# Altium PCB LED-Chaser.PcbDoc
Units mm, origin at the board's own origin, x right, y up, seen from the top; angles counter-clockwise.
Board outline 67 x 67 mm, 2 copper layers (Top Layer, Bottom Layer), stack 1.1 mm thick; 19 components, 17 nets, 59 pads, 12 vias.
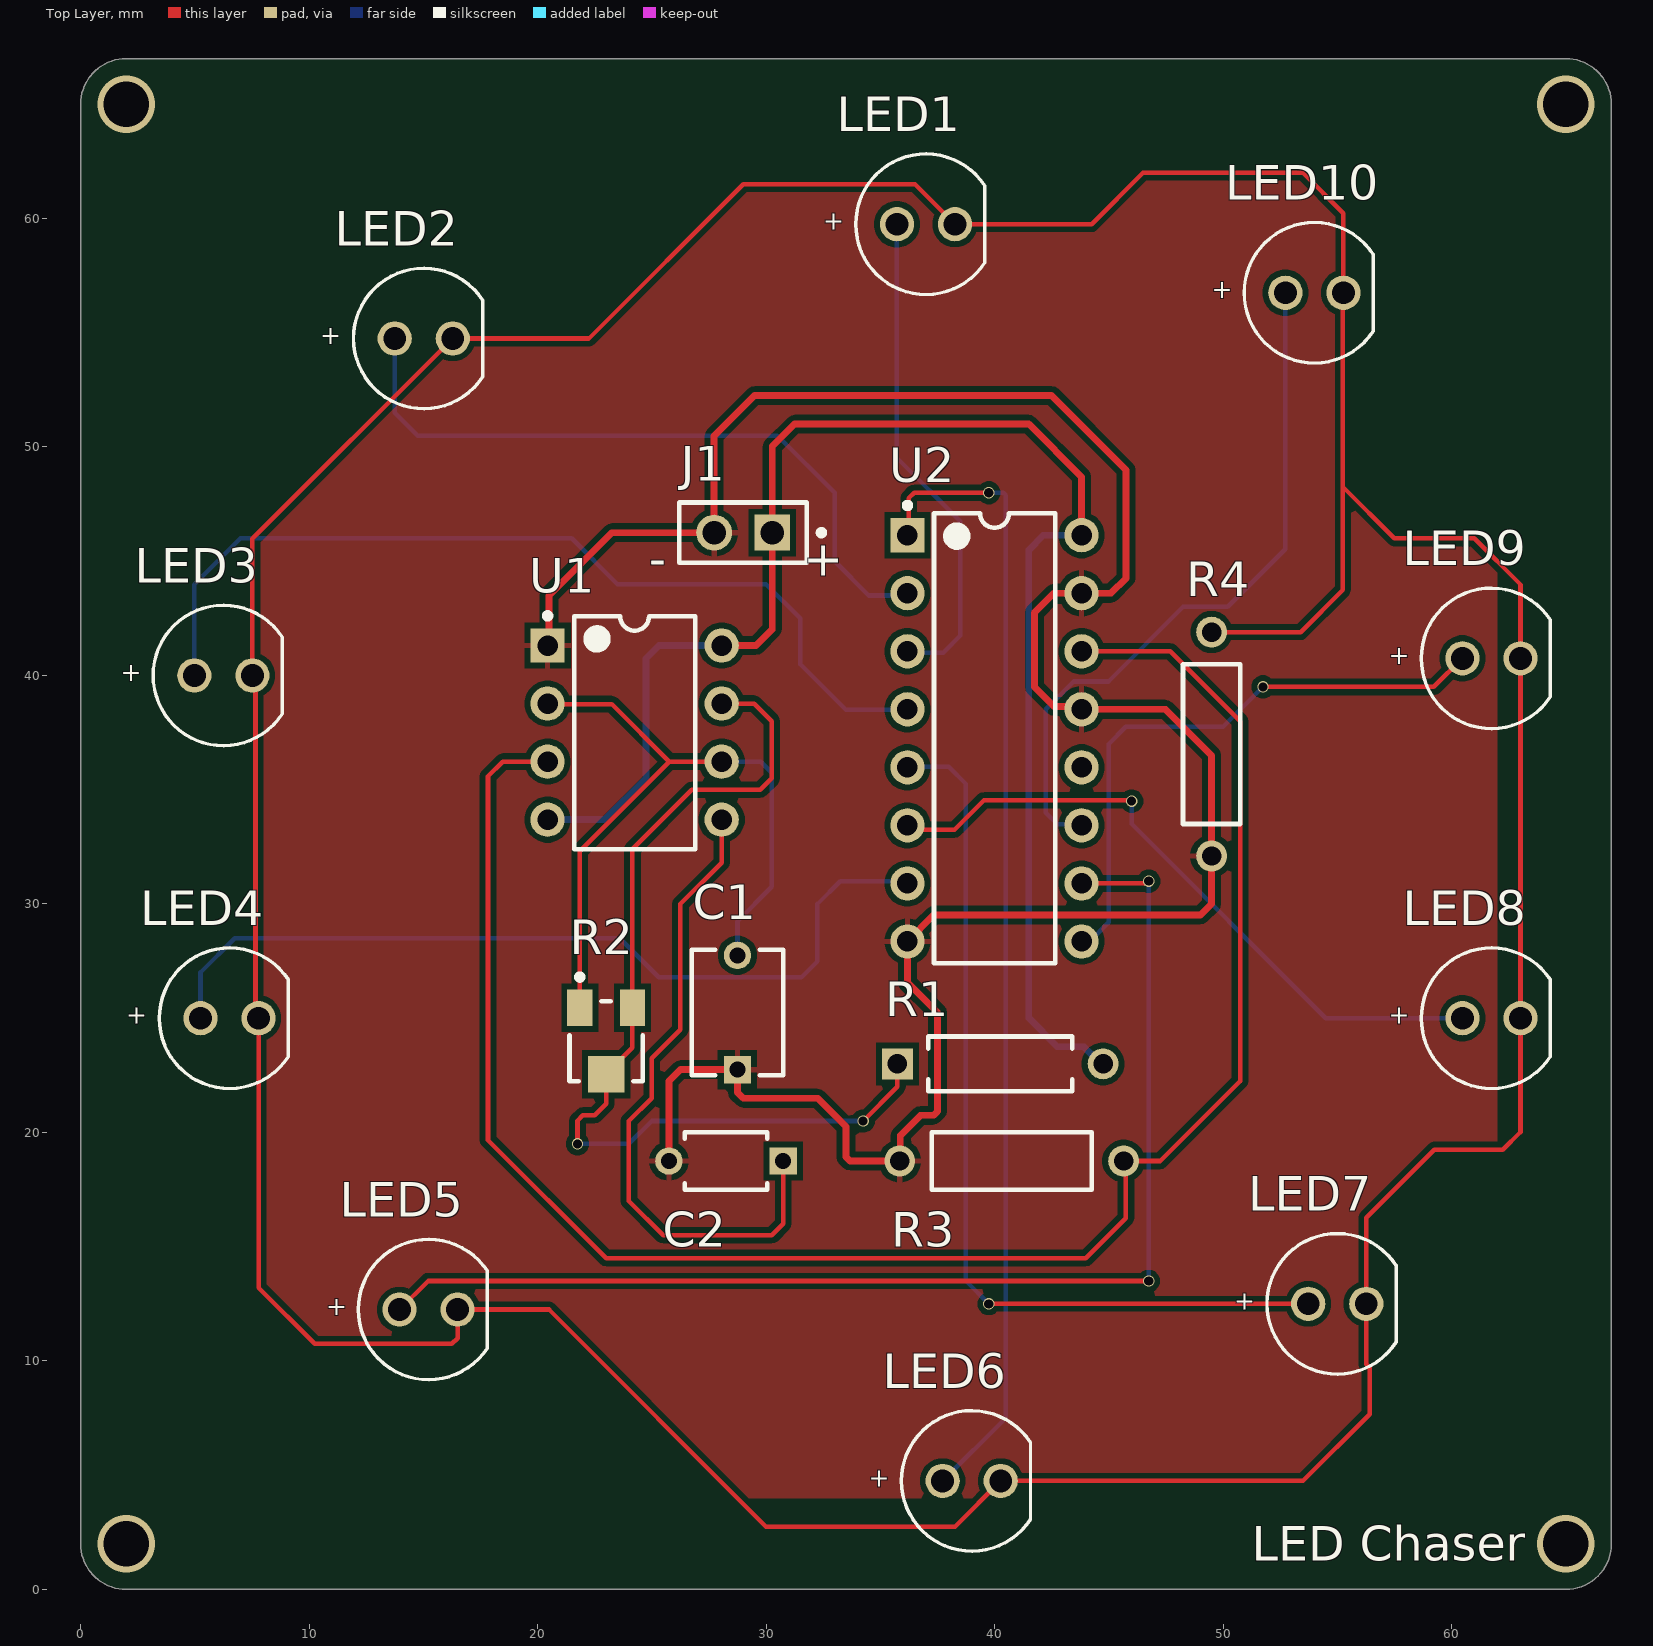
[diagram p0: Top Layer view]
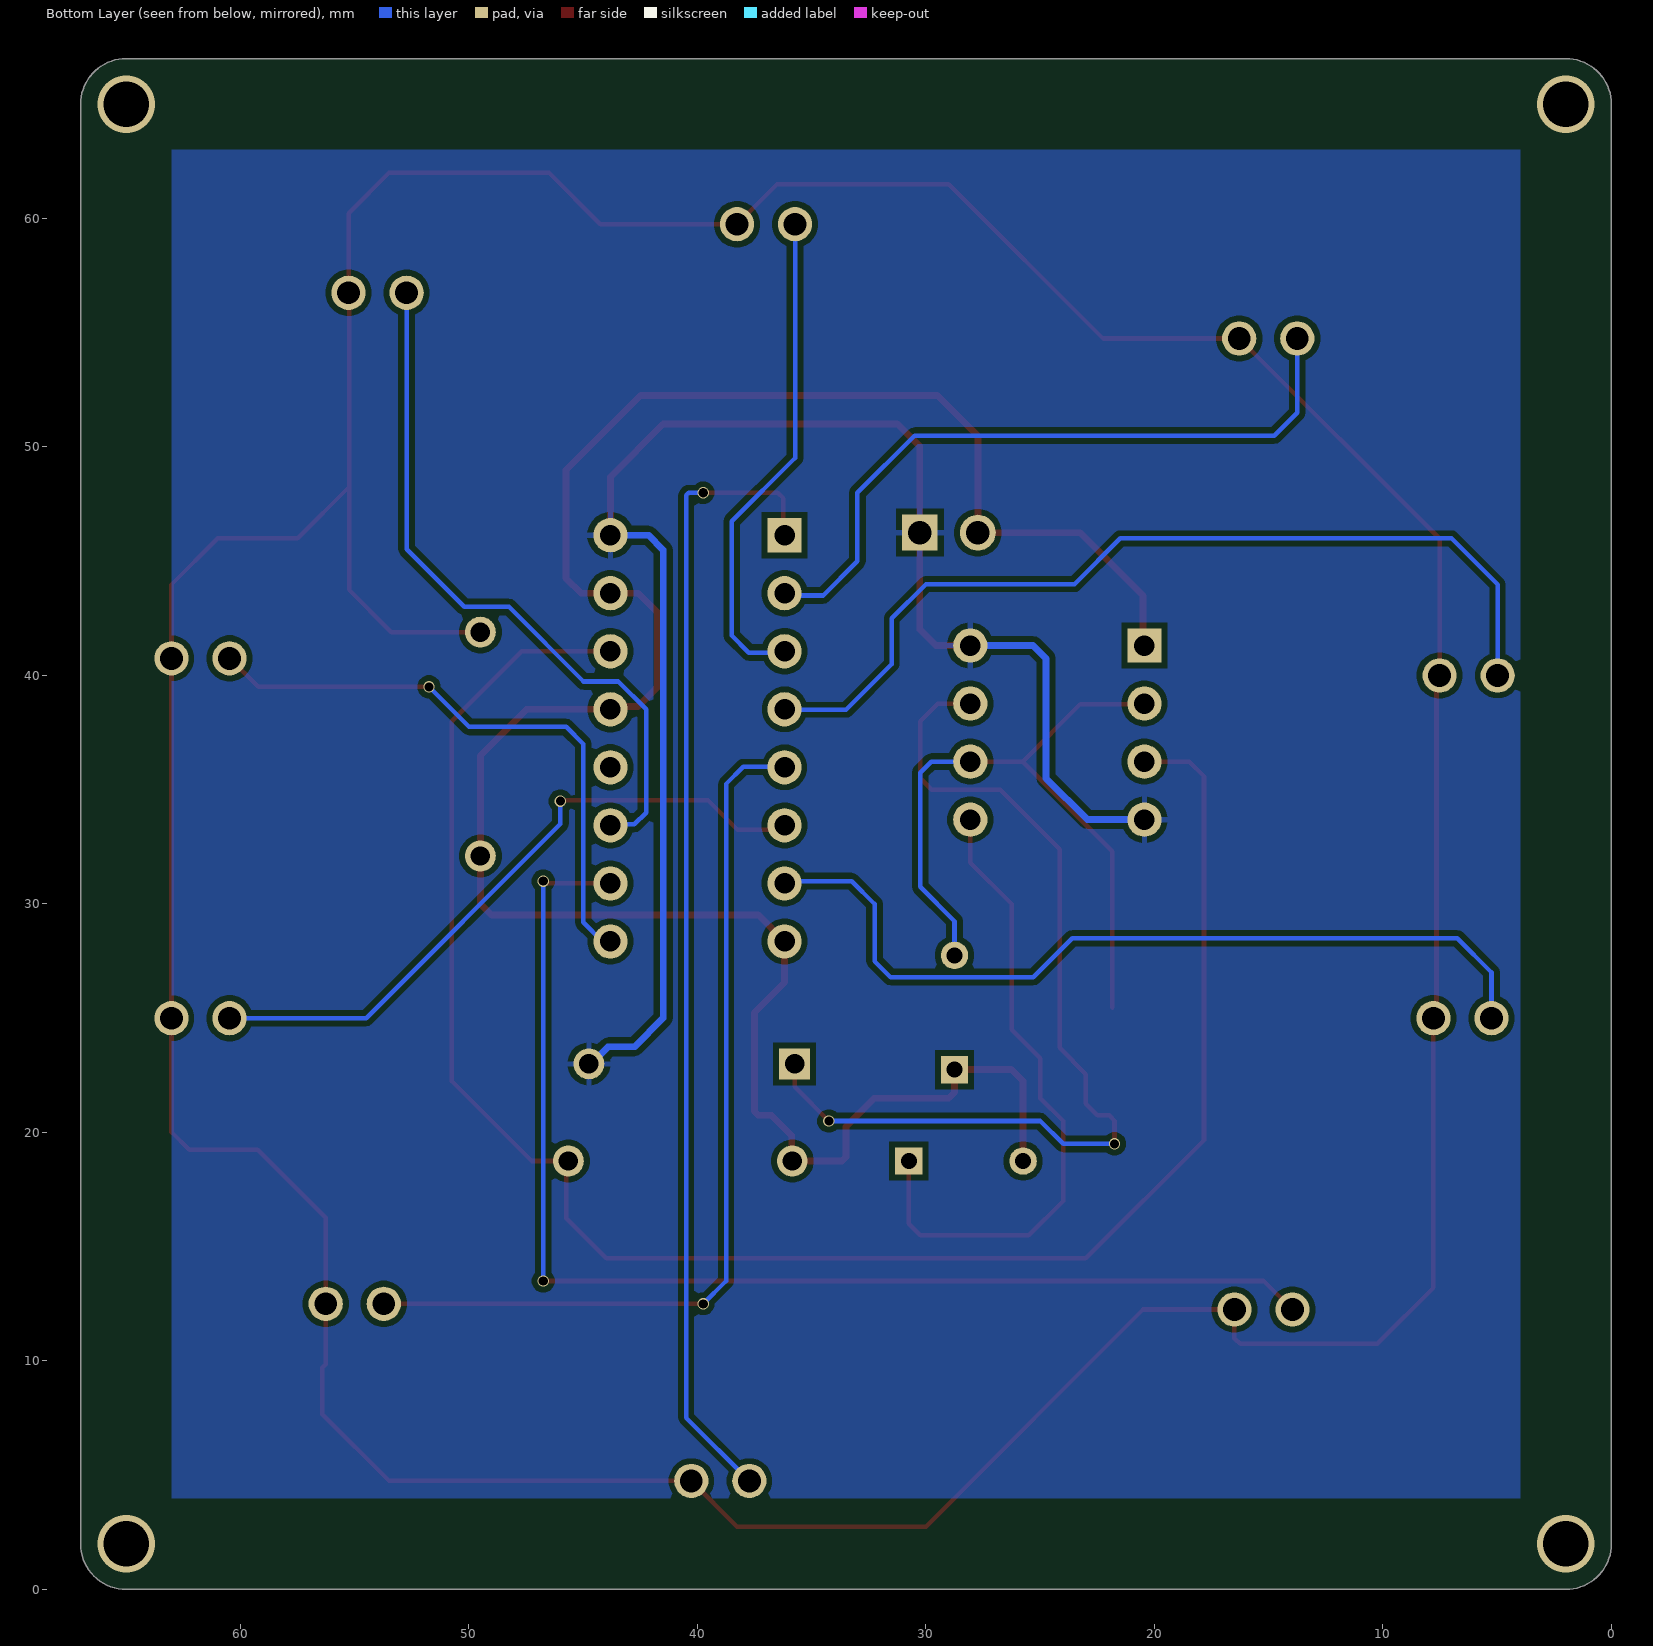
[diagram p1: Bottom Layer view, seen from below]
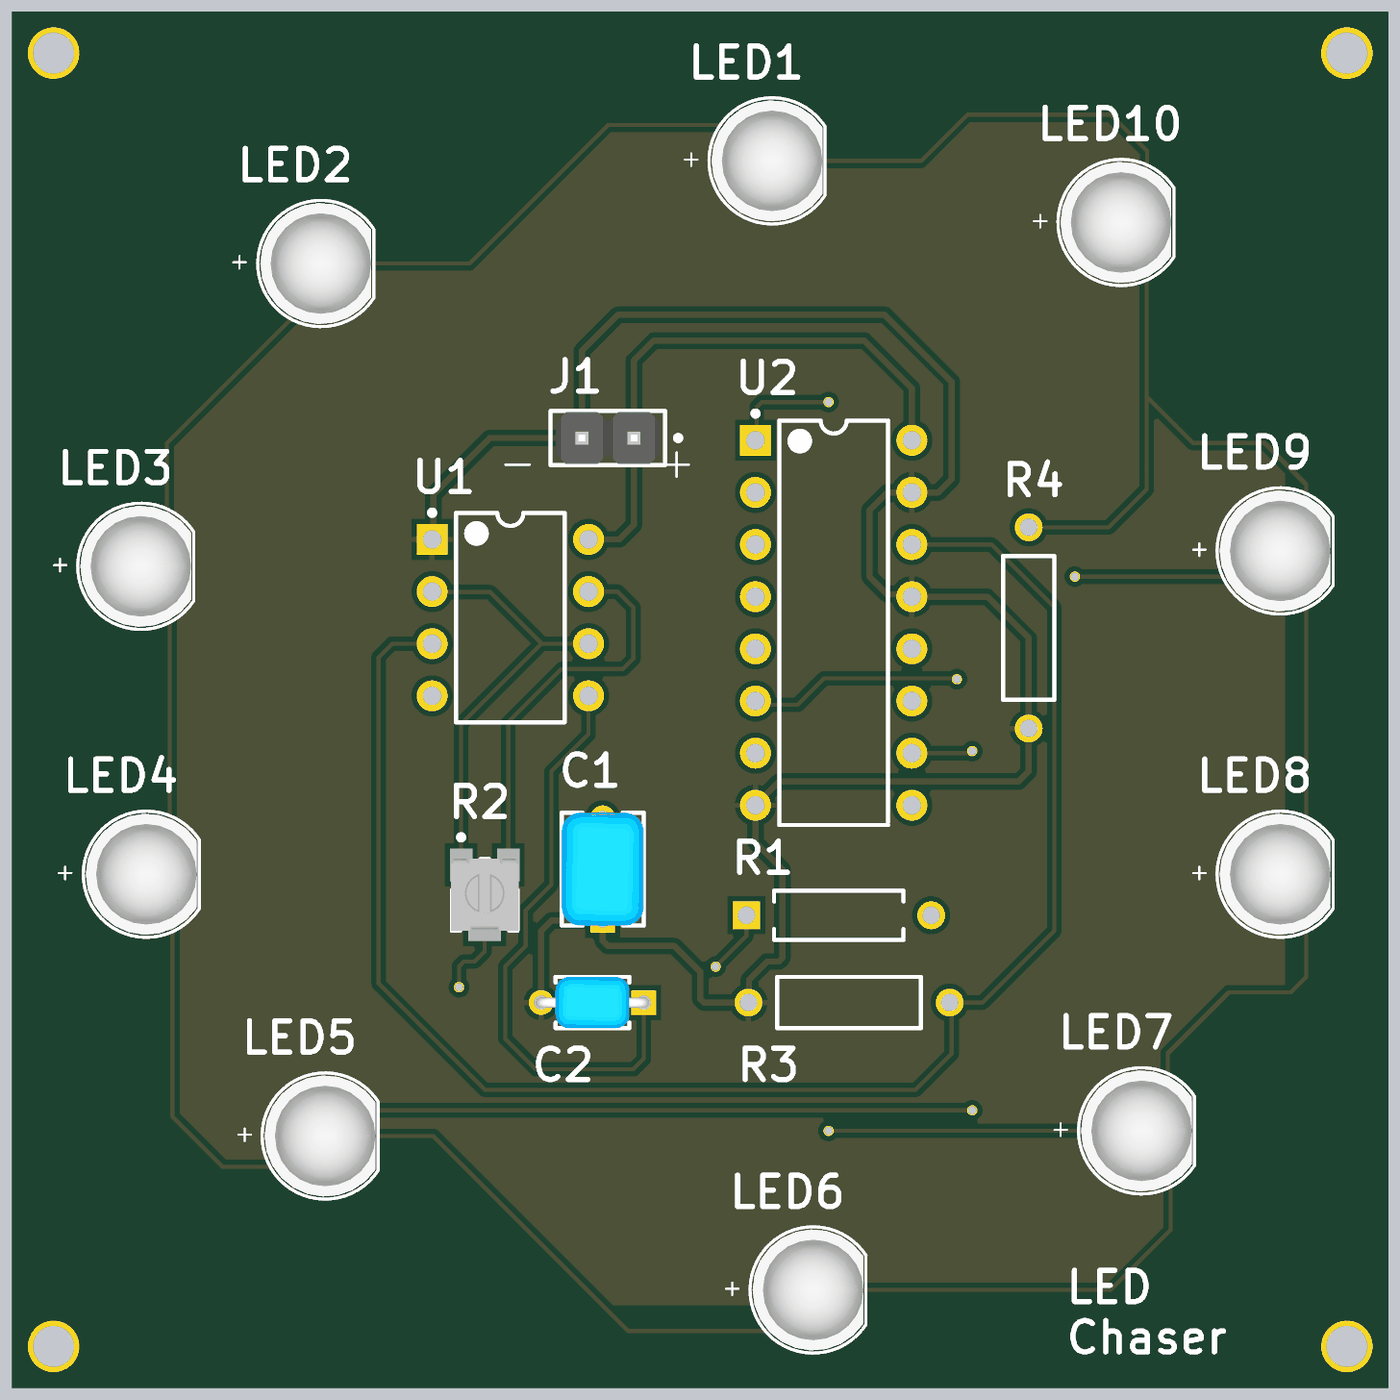
[diagram p2: 3D render of the assembled board from above, using the file's embedded part models]

## Layer stack, top to bottom
Top Solder: solder mask 0.05, Solder Resist, Dk 3.5
Top Layer: signal copper 0.1
Dielectric 1: dielectric 0.9, FR-4, Dk 4.8
Bottom Layer: signal copper 0.1
Bottom Solder: solder mask 0.05, Solder Resist, Dk 3.5

## Board outline
2,0 65,0 ccw(c65,2) 67,2 67,65 ccw(c65,65) 65,67 2,67 ccw(c2,65) 0,65 0,2 ccw(c2,2)

## Design rules (kind name [scope] priority, off if disabled: settings)
Clearance [All] p1: gap=0.25 ignorepadtopadclearanceinfootprint=FALSE
PolygonConnect [All] p1: connectstyle=Relief reliefconductorwidth=0.254 reliefentries=4 polygonreliefangle="90 Angle" airgapwidth=0.254
RoutingVias [All] p1: holewidth=0.4 width=0.5 viastyle="Through Hole" minholewidth=0.4 minwidth=0.5 maxholewidth=0.4 maxwidth=0.5
SolderMaskExpansion [All] p1: expansion=0 istentingtop=FALSE
Width WidthPOW [(InNet('VCC') OR InNet('GND'))] p1: maxlimit=0.3 minlimit=0.2 preferedwidth=0.3
Width [All] p2: maxlimit=0.2 minlimit=0.1 preferedwidth=0.2
30 further rules are at their usual default settings.

## Components (designator, comment, footprint, x,y, rotation, side; value= is the part's Value field where it differs from the comment)
C1 "RCER71E226MWM1H03A" FP-RCEWM1-MFG 28.75,25.25 r90 top
C2 "RCER71H103K0K1H03B" FP-RCE0K1-MFG 28.25,18.75 r180 top
J1 "M20-9990246" FP-M20-9990246-MFG 29,46.25 r180 top
LED1 "151051BS04000" WL-TMRC_D5.9H8.7 37,59.75 r0 top
LED2 "151051BS04000" WL-TMRC_D5.9H8.7 15.02,54.75 r0 top
LED3 "151051BS04000" WL-TMRC_D5.9H8.7 6.25,40 r0 top
LED4 "151051BS04000" WL-TMRC_D5.9H8.7 6.52,25 r0 top
LED5 "151051BS04000" WL-TMRC_D5.9H8.7 15.23,12.25 r0 top
LED6 "151051BS04000" WL-TMRC_D5.9H8.7 39,4.75 r0 top
LED7 "151051BS04000" WL-TMRC_D5.9H8.7 55,12.5 r0 top
LED8 "151051BS04000" WL-TMRC_D5.9H8.7 61.75,25 r0 top
LED9 "151051BS04000" WL-TMRC_D5.9H8.7 61.75,40.75 r0 top
LED10 "151051BS04000" WL-TMRC_D5.9H8.7 54,56.75 r0 top
R1 "MFR-25FBF52-1M" RESA60-630X240 40.25,23 r0 top value=1M
R2 "3313J-1-503E" BOUR-3313J-1_V 23,24 r270 top
R3 "OD103JE" OMTE-RES7X2.5-2 40.75,18.75 r0 top
R4 "OD103JE" OMTE-RES7X2.5-2 49.5,37 r90 top
U1 "NE555P" P0008A 24.25,37.5 r0 top
U2 "CD74HC4017E" N0016A 40,37.25 r0 top

## Footprints (in the part's own frame and the unit in brackets; to place one, negate y for a bottom-side part, rotate by r counter-clockwise, add the part's x,y. Pads: shape width x height; smd on the part's side, far side on the other; paste and mask are expansions set on the pad)
BOUR-3313J-1_V [mm] "SMD, 3-Leads, Body 3.5x3.2mm, Pitch 1.15mm"
  rect 1.6x1.1 smd paste+0: 1(-1.45,-1.15) 3(-1.45,1.15)
  rect 1.6x1.6 smd paste+0: 2(1.45,0)
  silkscreen extent -2.92,-1.6 1.75,1.6, body extent -1.75,-1.65 1.75,1.65, height 2.11
FP-M20-9990246-MFG [mm]
  rect 1.57x1.57 hole 1.02 paste-2539.97 mask+0: 1(-1.27,0)
  round 1.57 hole 1.02 paste-2539.97 mask+0: 2(1.27,0)
  silkscreen extent -3.55,-1.32 2.79,1.32, body extent -2.89,-1.42 2.89,1.42, height 0.25
FP-RCE0K1-MFG [mm]
  rect 1.2x1.2 hole 0.7 paste-2539.97 mask+0: 1(-2.5,0)
  round 1.2 hole 0.7 paste-2539.97 mask+0: 2(2.5,0)
  silkscreen extent -1.8,-1.25 1.8,1.25, body extent -3.2,-1.35 3.2,1.35, height 0.25
FP-RCEWM1-MFG [mm]
  rect 1.2x1.2 hole 0.7 paste-2539.97 mask+0: 1(-2.5,0)
  round 1.2 hole 0.7 paste-2539.97 mask+0: 2(2.5,0)
  silkscreen extent -2.75,-2 2.75,2, body extent -3.2,-2.1 3.2,2.1, height 0.25
N0016A [mm] "DIP, 16-Leads, Body 19.7x6.6mm, Pitch 2.54mm"
  rect 1.5x1.5 hole 0.9: 1(-3.81,8.89)
  round 1.5 hole 0.9: 2(-3.81,6.35) 3(-3.81,3.81) 4(-3.81,1.27) 5(-3.81,-1.27) 6(-3.81,-3.81) 7(-3.81,-6.35) 8(-3.81,-8.89) 9(3.81,-8.89) 10(3.81,-6.35) 11(3.81,-3.81) 12(3.81,-1.27) 13(3.81,1.27) 14(3.81,3.81) 15(3.81,6.35) 16(3.81,8.89)
  silkscreen extent -3.93,-9.85 2.65,10.31, body extent -3.95,-9.85 3.95,9.85, height 5.08
OMTE-RES7X2.5-2 [mm] "Resistor, Axial; Body 7x2.5mm, Lead Dia. 0.6mm"
  round 1.35 hole 0.85: 1(-4.9,0) 2(4.9,0)
  silkscreen extent -3.5,-1.25 3.5,1.25, body extent -3.5,-1.25 3.5,1.25, height 2.5
P0008A [mm] "DIP, 8-Leads, Body 10.15x6.6mm, Pitch 2.54mm"
  rect 1.5x1.5 hole 0.9: 1(-3.81,3.81)
  round 1.5 hole 0.9: 2(-3.81,1.27) 3(-3.81,-1.27) 4(-3.81,-3.81) 5(3.81,-3.81) 6(3.81,-1.27) 7(3.81,1.27) 8(3.81,3.81)
  silkscreen extent -3.93,-5.1 2.65,5.23, body extent -3.95,-5.07 3.95,5.07, height 5.08
RESA60-630X240 [mm] "Axial Resistor, 2-Leads, Dia 2.4mm, Body Length 6.3mm"
  rect 1.35x1.35 hole 0.85: 1(-4.5,0)
  round 1.35 hole 0.85: 2(4.5,0)
  silkscreen extent -3.15,-1.2 3.15,1.2, body extent -4.77,-1.19 4.77,1.2, height 2.4
WL-TMRC_D5.9H8.7 [mm] "THT Mono-color Round Color LED, 2-leads"
  round 1.5 hole 1: 1(-1.27,0) 2(1.27,0)
  silkscreen extent -3.07,-3.07 2.58,3.08, body extent -2.95,-2.95 2.45,2.95, height 9.2

## Part data
C1: library part CMP-06035-003622-1, "CAP CER 22UF 25V X7R RADIAL", Capacitance=22uF, Case/Package=Radial, Dielectric=X7R, Max Operating Temperature=125°C, Min Operating Temperature=-55°C, Package Quantity=1500, Ratings=AEC-Q200, Resistor Type=Ceramic, Tolerance=20%, Voltage Rating=25V, Height=7.5mm, Height - Seated (Max)=0.295inch, Lead Diameter=0.5mm, Lead Pitch=0.197inch, Lead/Base Style="Formed Leads", Length=0.217inch, Mount="Through Hole", Packaging="Tape and Reel", Termination=Radial, Voltage Rating (DC)=25V, Width=0.157inch
C2: library part CMP-06035-044411-1, "Cap Ceramic 10nF 50V X7R ±10% Radial 5mm +125°C Automotive Bulk", Capacitance=10nF, Case/Package=Radial, Dielectric=X7R, Max Operating Temperature=125°C, Min Operating Temperature=-55°C, Package Quantity=500, Ratings=AEC-Q200, Resistor Type=Ceramic, Tolerance=10%, Voltage Rating=50V, Height=3.5mm, Height - Seated (Max)=0.138inch, Lead Diameter=0.5mm, Lead Free="Lead Free", Lead Pitch=0.197inch, Lead/Base Style="Formed Leads", Length=0.142inch, Mount="Through Hole", Packaging=Bulk, Termination=Radial, Voltage Rating (DC)=50V, Width=0.098inch
J1: library part CMP-15831-000009-1, "CONN HEADER VERT 2POS 2.54MM", Current Rating=3A, Manufacturer=Harwin, Temperature="-40°C to +105°C", Temperature Range High=+105°C, Temperature Range Low=-40°C, Automotive=No, Category=Conn, ComponentLink2Description=Datasheet, ComponentLink2URL=https://cdn.harwin.com/pdfs/M20-999.pdf, Conn Gender=Male, Conn Orientation=Vertical, Contact Material=Tin,Nickel, Device Class L1=Connectors, Device Class L2="Headers and Wire Housings", Device Class L3=unset, Digikey Description="CONN HEADER VERT 2POS 2.54MM", Height=8.99mm, Lead Free=Yes, Manufacturer Part Number=M20-9990246, Mouser Description="2.54mm (0.1\") Pitch SIL Vertical PC Tail Pin Header, 6.1mm mating pin height, tin, 2 contacts", Number Of Contacts=2, Number Of Rows=1, Octopart=https://octopart.com/m20-9990246-harwin-2590635, Package=M20-9990246, Pitch=2.54mm, RoHS=TRUE
LED1 LED2 LED3 LED4 LED5 LED6 LED7 LED8 LED9 LED10: library part CMP-1488-00009-2, Case/Package=Radial, Color=Blue, Forward Current=100mA, Forward Voltage=3.2V, Max Operating Temperature=85°C, Max Reverse Voltage (DC)=5V, Min Operating Temperature=-40°C, Test Current=20mA, Dominant Wavelength=470nm, Height=8.6mm, Length=5mm, Lens Size=5mm, Lens Style="Circular, Diffused, Round", Luminous Intensity=500mcd, Mount="Through Hole", NexarPartId=29717812, Packaging=Bulk, Peak Wavelength=465nm, REACH SVHC=Unknown, RoHS=Compliant, Viewing Angle=40°, Wavelength=470nm, Width=5mm
R1: library part CMP-009-00049-4, "Axial Resistor, 1 MOhm, +/- 1%, 250 mW, -55 to 155 degC, 2-Pin THD, RoHS, Bulk", Case/Package=Axial, Manufacturer=Yageo, Max Operating Temperature=155°C, Min Operating Temperature=-55°C, Package Description="2-Pin Axial Lead, Dia 2.4 mm, Body Length 6.3 mm", Package Quantity=200, Package Reference=MFR-25, Power=250mW, Tolerance=1%, Voltage Rating=250V, Datasheet URL=http://www.yageo.com/documents/recent/Yageo%20LR_MFR_2013.pdf, Datasheet Version=Apr-13, Manufacturer URL=http://www.yageo.com/, Mounting Technology=TH, Packaging=Bulk, RoHS Compliant=True
R2: library part CMP-2000-05588-1, "3 mm Trimpot(R) Trimming Potentiometer, 50 KOhm, +/- 20%, 0.125 W, -55 to 125 degC, 3-Pin SMD, RoHS, Tape and Reel", Manufacturer=Bourns, Package Description="3-Pin Surface Mount Device, Body 3.5 x 3.2 mm, Pitch 1.15 mm", Package Reference=3313J-1, Power Rating=125mW, Resistance Tolerance=±20%, Temperature Coefficient=±150ppm/°C, Track Resistance=50kohm, Datasheet URL=http://www.bourns.com/docs/Product-Datasheets/3313.pdf, Datasheet Version=05/2016, Manufacturer URL=http://www.bourns.com/, Mounting Technology=SurfaceMount, No. of Turns=1, Potentiometer Mounting=SMD, SVHC=NoSVHC(19-Dec-2012)
R3: library part CMP-2000-06865-1, "Little Demon(R) Carbon Composition Molded OD Series, 250 V, 10 KOhm, +/-5%, -70 to 130 degC, 2-Pin THD, RoHS, Bulk", Manufacturer=Ohmite, Operating Temperature=-, Package / Case=Axial, Package Description="2-Pin THD Resistor, Body 7 x 2.5 mm, Lead Dia. 0.6 mm", Package Reference=RES7X2.5, Power (Watts)=0.25W,1/4W, Power Rating=0.25W, Resistance (Ohms)=10k, Standard Package=100, Tolerance=±5%, Catalog Drawings=OD,OF,OASeries, Category=Resistors, Composition=CarbonComposition, Datasheet URL=http://www.ohmite.com/cat/res_od_of_oa.pdf, Datasheet Version=06/2016, EDA / CAD Models=DownloadfromAcceleratedDesigns, Family=ThroughHoleResistors, Features=PulseWithstanding, Height=-, Manufacturer URL=http://www.ohmite.com/, Mounting Technology=ThroughHole, Number of Terminations=2, Online Catalog=OD,OF,OASeries,LittleDemon®, Packaging=Bulk, PartNumber=OD103JE, RoHS Information="LittleDemon\"E\"SeriesMaterialDeclaration", Series=LittleDemon®OD, Size / Dimension="0.098\"Diax0.276\"L(2.50mmx7.00mm)", Supplier Device Package=Axial, Temperature Coefficient=-
R4: library part CMP-2000-06865-1, "Little Demon(R) Carbon Composition Molded OD Series, 250 V, 10 KOhm, +/-5%, -70 to 130 degC, 2-Pin THD, RoHS, Bulk", Manufacturer=Ohmite, Operating Temperature=-, Package / Case=Axial, Package Description="2-Pin THD Resistor, Body 7 x 2.5 mm, Lead Dia. 0.6 mm", Package Reference=RES7X2.5, Power (Watts)=0.25W,1/4W, Power Rating=0.25W, Resistance (Ohms)="120 ohm", Standard Package=100, Tolerance=±5%, Catalog Drawings=OD,OF,OASeries, Category=Resistors, Composition=CarbonComposition, Datasheet URL=http://www.ohmite.com/cat/res_od_of_oa.pdf, Datasheet Version=06/2016, EDA / CAD Models=DownloadfromAcceleratedDesigns, Family=ThroughHoleResistors, Features=PulseWithstanding, Height=-, Manufacturer URL=http://www.ohmite.com/, Mounting Technology=ThroughHole, Number of Terminations=2, Online Catalog=OD,OF,OASeries,LittleDemon®, Packaging=Bulk, PartNumber=OD103JE, RoHS Information="LittleDemon\"E\"SeriesMaterialDeclaration", Series=LittleDemon®OD, Size / Dimension="0.098\"Diax0.276\"L(2.50mmx7.00mm)", Supplier Device Package=Axial, Temperature Coefficient=-
U1: library part CMP-2000-04954-1, "Precision Timer, 4.5 to 16 V, 0 to 70 degC, 8-Pin DIP, Pb-Free, Tube", Manufacturer=TexasInstruments, Maximum High Level Output Current=-200mA, Maximum Low Level Output Current=200mA, Operating Supply Voltage=5, Package=8PDIP, Package Description="8-Pin Double In-line Package, Body 9.59 x 6.35 mm, Pitch 2.54 mm", Package Reference=P8, Category=Timer, Datasheet URL=http://www.ti.com/general/docs/lit/getliterature.tsp?genericPartNumber=NE555&fileType=pdf, Datasheet Version="Rev. I, 09/2014", Manufacturer URL=http://www.ti.com/, Number of Internal Timers=1, Package URL=http://www.ti.com/lit/ml/mpdi001b/mpdi001b.pdf, Packaging=Rail/Tube, Rad Hard=No, Type=Standard
U2: library part CMP-1623-00548-2, "High Speed CMOS Logic Decade Counter/Divider with 10 Decoded Outputs, N0016A, TUBE", F @ Nom Voltage(Max)(Mhz)=28, Generic Part Number=CD74HC4017, ICC @ Nom Voltage(Max)(mA)=0.08, Manufacturer="Texas Instruments", Operating Temperature Range(C)="-55 to 125", Rating=Catalog, tpd @ Nom Voltage(Max)(ns)=54, Voltage(Nom)(V)=3.3,5, Bits(#)=10, Code_JEDEC=MS-001, DatasheetVersion=SCHS200D, Function=Counter, Input Type=LVTTL/CMOS, Inputs=1, Output Drive (IOL/IOH)(Max)(mA)=5.2/-5.2, Output Type=CMOS, PackageReference=N0016A, Schmitt Trigger=No, Technology Family=HC, Type=Decade, VCC(Max)(V)=6, VCC(Min)(V)=2

## Via types
v1: diameter 0.5, hole 0.4, Top Layer to Bottom Layer, 8 vias
v2: diameter 2.5, hole 2, Top Layer to Bottom Layer, 4 vias

## Nets (pads, with @x,y where several pads share a name; then routed paths per layer and width w, separated by ;. In a path a pad name is that pad's centre, name@x,y a point inside that pad or via, vN(x,y) a via of type N, cw(c..) or ccw(c..) an arc to the next point about the centre after c; other vN are vias at no path point)
GND: C1.1 C2.2 J1.2 R3.1 R4.1 U1.1 U2.8 U2.13 U2.15 | length 105
  Top Layer w0.3: U1.1 20.5,41.37 20.5,43.5 23.25,46.25 J1.2 27.73,50.48 29.5,52.25 42.5,52.25 45.75,49 45.75,44.25 45.1,43.6 42.6,43.6 41.75,42.75 41.75,39.5 42.61,38.64 43.69,38.64 U2.13 47.48,38.52 49.5,36.5 R4.1 49.5,30 49.01,29.51 37.34,29.51 U2.8 36.19,26.56 37.5,25.25 37.5,20.926 37.324,20.75 36.75,20.75 35.875,19.875 35.875,18.775 R3.1 33.676,18.75 33.5,18.926 33.5,20.25 32.25,21.5 29,21.5 28.75,21.75 C1.1 26.25,22.75 25.75,22.25 C2.2
NetC1_2: C1.2 R2.1 U1.2 U1.6 | length 32.1
  Top Layer w0.2: U1.2 20.46,38.75 23.25,38.75 25.77,36.23 ; R2.1 21.85,32.31 25.77,36.23 ; U1.6 25.77,36.23
  Bottom Layer w0.2: U1.6 29.77,36.23 30.25,35.75 30.25,30.75 28.75,29.25 C1.2
NetC2_1: C2.1 U1.5 | length 28.7
  Top Layer w0.2: U1.5 28.06,31.81 26.25,30 26.25,24.5 25,23.25 25,21.5 24,20.5 24,17 25.5,15.5 30.25,15.5 30.75,16 C2.1
NetLED1_1: LED1.1 U2.3 | length 21.8
  Bottom Layer w0.2: LED1.1 35.73,49.52 38.5,46.75 38.5,41.75 37.75,41 36.25,41 U2.3
NetLED1_2: LED1.2 LED2.2 LED3.2 LED4.2 LED5.2 LED6.2 LED7.2 LED8.2 LED9.2 LED10.2 R4.2 | length 219.9
  Top Layer w0.2: LED3.2@7.5,40 LED3.2 ; LED4.2@7.75,25 LED4.2 ; LED1.2@38.25,59.75 38.25,59.77 36.52,61.5 29,61.5 22.25,54.75 LED2.2 7.52,45.98 LED3.2 ; LED1.2 44.25,59.75 46.5,62 53.5,62 55.27,60.23 LED10.2 55.25,56.73 55.25,48.25 ; R4.2 53.4,41.9 55.25,43.75 55.25,48.25 ; LED3.2 7.655,39.865 7.655,25.135 LED4.2 ; LED4.2 7.79,13.21 10.25,10.75 16.25,10.75 16.5,11 LED5.2 20.5,12.25 30,2.75 38.27,2.75 LED6.2 53.5,4.75 56.417,7.667 56.417,9.71 56.27,9.857 LED7.2 56.27,16.27 59.25,19.25 62.25,19.25 63.02,20.02 LED8.2 LED9.2 63.02,43.98 61,46 57.5,46 55.25,48.25
NetLED2_1: LED2.1 U2.2 | length 30.8
  Bottom Layer w0.2: LED2.1 13.75,51.5 14.75,50.5 30.5,50.5 33,48 33,45 34.5,43.5 36.09,43.5 U2.2
NetLED3_1: LED3.1 U2.4 | length 40.3
  Bottom Layer w0.2: LED3.1 4.98,43.98 7,46 21.5,46 23.5,44 30,44 31.5,42.5 31.5,40.5 33.5,38.5 36.17,38.5 U2.4
NetLED4_1: LED4.1 U2.7 | length 37.5
  Bottom Layer w0.2: LED4.1 5.25,27 6.75,28.5 23.597,28.5 25.297,26.8 31.55,26.8 32.25,27.5 32.25,30 33.25,31 36.09,31 U2.7
NetLED5_1: LED5.1 U2.10 | length 53.8
  Top Layer w0.2: LED5.1 15.21,13.5 v1(46.75,13.5) ; U2.10 46.569,30.9 46.669,31 v1(46.75,31)
  Bottom Layer w0.2: v1(46.75,13.5) v1(46.75,31)
NetLED6_1: LED6.1 U2.1 | length 50.3
  Top Layer w0.2: U2.1 36.25,46.2 36.25,47.766 36.484,48 v1(39.75,48)
  Bottom Layer w0.2: LED6.1 40.5,7.52 40.5,47.883 40.383,48 v1(39.75,48)
NetLED7_1: LED7.1 U2.5 | length 40
  Top Layer w0.2: v1(39.75,12.5) LED7.1
  Bottom Layer w0.2: U2.5 36.21,36 38,36 38.75,35.25 38.75,13.5 v1(39.75,12.5)
NetLED8_1: LED8.1 U2.6 | length 29.4
  Top Layer w0.2: U2.6 36.38,33.25 38.25,33.25 39.54,34.54 45.96,34.54 v1(46,34.5)
  Bottom Layer w0.2: v1(46,34.5) 46,33.5 54.5,25 LED8.1
NetLED9_1: LED9.1 U2.9 | length 26.4
  Top Layer w0.2: v1(51.75,39.5) 59.23,39.5 LED9.1
  Bottom Layer w0.2: U2.9 44.162,28.36 45,29.198 45,37 45.75,37.75 50,37.75 v1(51.75,39.5)
NetLED10_1: LED10.1 U2.11 | length 30.9
  Bottom Layer w0.2: U2.11 43.76,33.49 42.76,33.49 42.25,34 42.25,38.516 43.472,39.738 44.988,39.738 48.25,43 50.21,43 52.73,45.52 LED10.1
NetR1_1: R1.1 R2.2 R2.3 U1.7 | length 42.6
  Top Layer w0.2: v1(21.75,19.5) 21.75,20.516 21.984,20.75 22.5,20.75 23,21.25 R2.2 24.15,23.7 R2.3 24.15,32.4 26.75,35 29.75,35 30.25,35.5 30.25,38 29.48,38.77 U1.7 ; v1(34.25,20.5) 35.75,22 R1.1
  Bottom Layer w0.2: v1(21.75,19.5) 24,19.5 25,20.5 v1(34.25,20.5)
NetR3_2: R3.2 U1.3 U2.14 | length 82.6
  Top Layer w0.2: U1.3 18.48,36.23 17.833,35.583 17.833,19.667 23,14.5 44,14.5 45.75,16.25 45.75,18.65 R3.2 47.25,18.75 50.75,22.25 50.75,38 47.69,41.06 U2.14
VCC: J1.1 R1.2 U1.4 U1.8 U2.16 | length 69.1
  Top Layer w0.3: U1.8@28,41.25 U1.8 29.56,41.31 30.27,42.02 J1.1 30.27,50.02 31.25,51 41.5,51 43.81,48.69 U2.16 43.81,46.19 U2.16@43.75,46.25
  Bottom Layer w0.3: U1.4 22.94,33.69 24.75,35.5 24.75,40.75 25.31,41.31 27.94,41.31 U1.8@28,41.25 ; U2.16@43.75,46.25 43.64,46.14 42.14,46.14 41.5,45.5 41.5,25 42.75,23.75 43.909,23.75 44.659,23 R1.2
pads on no net: U2.12
copper on no net:
  other v2: 2,2 65,2 2,65 65,65

## Polygon pours and split planes (outlines as drawn)
GND on Top Layer "GND_L01_P-001" (solid, remove dead copper, pour order 0): 4,63 4,4 63,4 62,5 62,63
VCC on Bottom Layer "VCC_L01_P-001" (solid, remove dead copper, pour order 1): 4,63 4,4 63,4 63,63

## Silkscreen, mask and mechanical layers (free items; w line width, h text height)
Top Overlay:
  text "-" at 25.625,44.363 h1.52
  text "+" at 33.375,44.371 h1.52
  text "LED Chaser" at 51.25,1.25 h1.52

## Text inside footprints (layer, text, board x,y; h text height)
LED1: Top Overlay "+" at 32.5,59.5 h0.8
LED2: Top Overlay "+" at 10.5,54.5 h0.8
LED3: Top Overlay "+" at 1.75,39.75 h0.8
LED4: Top Overlay "+" at 2,24.75 h0.8
LED5: Top Overlay "+" at 10.75,12 h0.8
LED6: Top Overlay "+" at 34.5,4.5 h0.8
LED7: Top Overlay "+" at 50.5,12.25 h0.8
LED8: Top Overlay "+" at 57.25,24.75 h0.8
LED9: Top Overlay "+" at 57.25,40.5 h0.8
LED10: Top Overlay "+" at 49.5,56.5 h0.8